# EAGLE board sh  j (EAGLE 7.2.0)
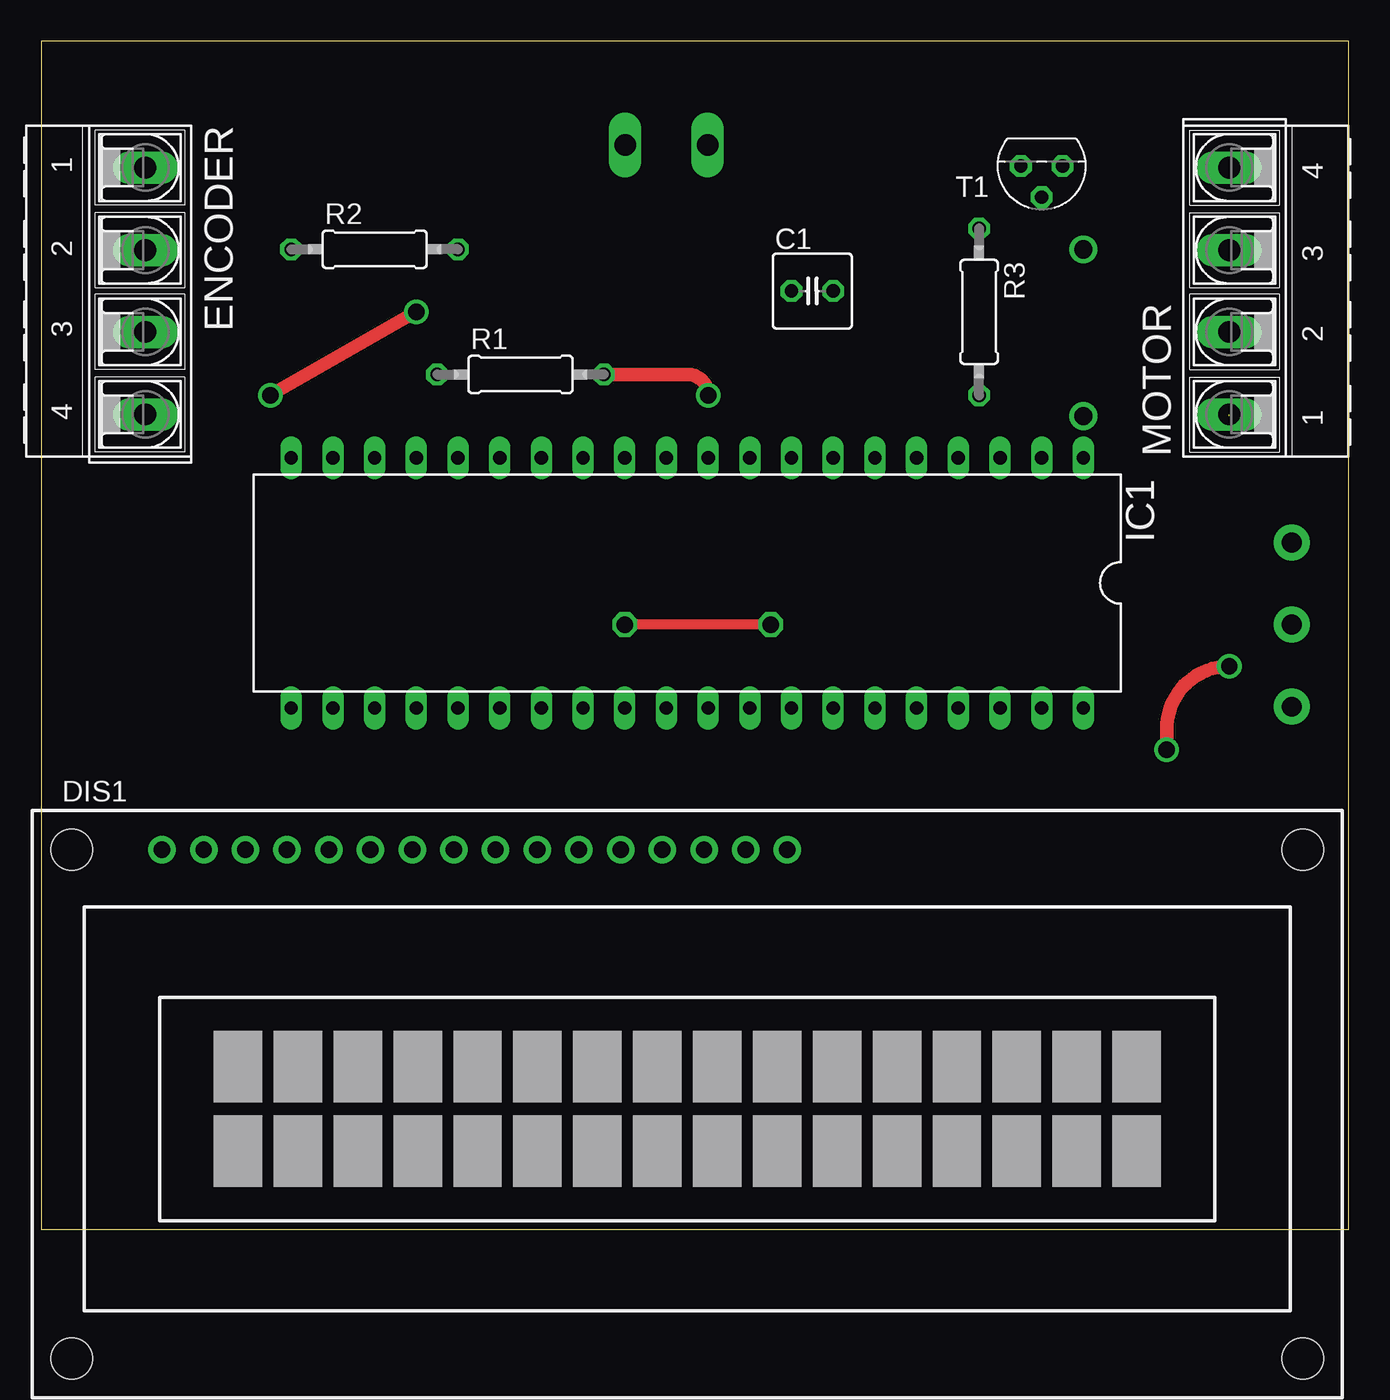
[diagram p0: board, top side]
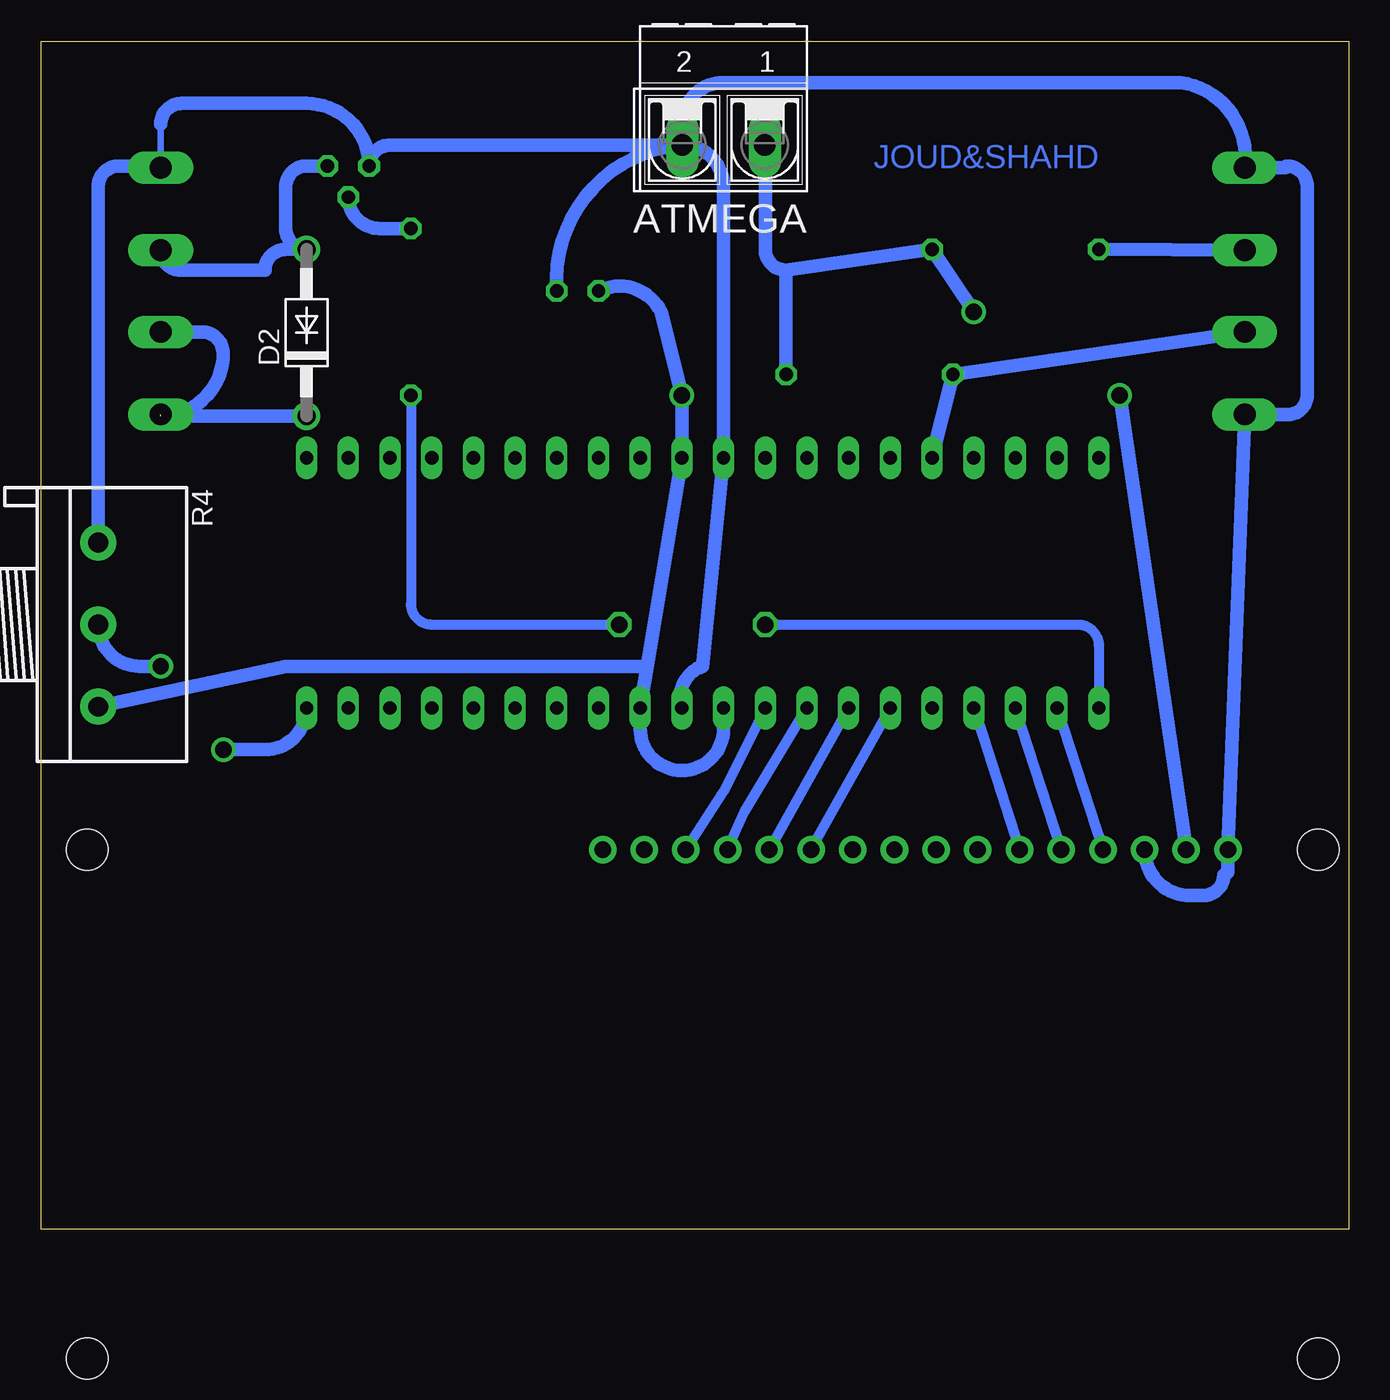
[diagram p1: board, bottom side, seen from below]

Size 79.68 x 72.38 mm. Coordinates in mm from the lower left corner, seen from the top.
Outline: 0,0 79.68,0 79.68,72.38 0,72.38 0,0
Copper layers (1*16): Top 0.035mm / dielectric 1.5mm / Bottom 0.035mm
Design rules "default": minimum track width 10mil, minimum drill 24mil, track to track 8mil, track to pad 8mil, pad to pad 8mil, via to via 8mil, smd to smd 8mil, copper to edge 40mil, drill to drill 8mil, minimum pad ring 10mil, minimum via ring 8mil, stop-mask expansion 4mil, vias tented up to drill 0mil, thermal gap 10mil

## Footprints (pad centres in the part's own frame; a part is rotated, then mirrored left to right if it is on the bottom)
AK500/2-H = drill 1.321 long: 1 -2.515,0; 2 2.515,0
C025-050X050 = drill 0.813 octagon: 1 -1.27,0; 2 1.27,0
DO41-10 = drill 1.118: A 5.08,0; C -5.08,0
TUXGR_16X2_R2 = drill 1 pad 1.676: 1 -32,15.5; 2 -29.46,15.5; 3 -26.92,15.5; 4 -24.38,15.5; 5 -21.84,15.5; 6 -19.3,15.5; 7 -16.76,15.5; 8 -14.22,15.5; 9 -11.68,15.5; 10 -9.14,15.5; 11 -6.6,15.5; 12 -4.06,15.5; 13 -1.52,15.5; 14 1.02,15.5; 15 3.56,15.5; 16 6.1,15.5 | hole 2.5: -37.5,-15.5; 37.5,-15.5; -37.5,15.5; 37.5,15.5
AK500/4-H = drill 1.321 long: 1 -7.518,0; 2 -2.489,0; 3 2.489,0; 4 7.518,0
DIL40 = drill 0.813 long: 1 -24.13,-7.62; 2 -21.59,-7.62; 3 -19.05,-7.62; 4 -16.51,-7.62; 5 -13.97,-7.62; 6 -11.43,-7.62; 7 -8.89,-7.62; 8 -6.35,-7.62; 9 -3.81,-7.62; 10 -1.27,-7.62; 11 1.27,-7.62; 12 3.81,-7.62; 13 6.35,-7.62; 14 8.89,-7.62; 15 11.43,-7.62; 16 13.97,-7.62; 17 16.51,-7.62; 18 19.05,-7.62; 19 21.59,-7.62; 20 24.13,-7.62; 21 24.13,7.62; 22 21.59,7.62; 23 19.05,7.62; 24 16.51,7.62; 25 13.97,7.62; 26 11.43,7.62; 27 8.89,7.62; 28 6.35,7.62; 29 3.81,7.62; 30 1.27,7.62; 31 -1.27,7.62; 32 -3.81,7.62; 33 -6.35,7.62; 34 -8.89,7.62; 35 -11.43,7.62; 36 -13.97,7.62; 37 -16.51,7.62; 38 -19.05,7.62; 39 -21.59,7.62; 40 -24.13,7.62
0207/10 = drill 0.813 octagon: 1 -5.08,0; 2 5.08,0
3RP/1610N = drill 1.2 pad 2.184: 1 -5,0; 2 0,0; 3 5,0
TO92 = drill 0.813 octagon: 1 1.27,0; 2 0,1.905; 3 -1.27,0

## Placement (x,y rotation side)
ATMEGA  [AK500/2-H]  38.1,66.04 180 bottom
C1  [C025-050X050]  46.99,57.15 0 top
D2  1N4004  [DO41-10]  63.5,54.61 90 bottom
DIS1  TUXGR_16X2_R2  [TUXGR_16X2_R2]  39.37,7.62 0 top
ENCODER  [AK500/4-H]  6.35,57.15 270 top
IC1  MEGA16-P  [DIL40]  39.37,39.37 180 top
MOTOR  [AK500/4-H]  72.39,57.15 90 top
R1  10k  [0207/10]  29.21,52.07 0 top
R2  330  [0207/10]  20.32,59.69 0 top
R3  220  [0207/10]  57.15,55.88 270 top
R4  [3RP/1610N]  76.2,36.83 270 bottom
T1  BC337  [TO92]  60.96,64.77 180 top

## Library data of the parts
ATMEGA ENCODER MOTOR = con-ptr500; OC_FARNELL: unknown; OC_NEWARK: unknown
C1 = rcl
D2 = diode
DIS1 = display-lcd; OC_FARNELL: unknown; OC_NEWARK: unknown
IC1 = atmel; MPN: ATMEGA16-16PU; OC_FARNELL: 9171142; OC_NEWARK: 01M6885
R1-R3 = resistor
R4 = pot
T1 = transistor

## Nets
N$1: DIS1.14 IC1.29
N$2: DIS1.13 IC1.28
N$3: DIS1.12 IC1.27
N$4: DIS1.11 IC1.26
N$5: DIS1.6 IC1.24
N$6: DIS1.5 IC1.23
N$7: DIS1.4 IC1.22
N$8: ATMEGA.2 C1.2 DIS1.1 DIS1.3 ENCODER.1 ENCODER.4 IC1.11 IC1.31 MOTOR.4 R4.1 T1.1
N$9: R3.1 T1.2
N$10: IC1.21 R3.2
N$11: ENCODER.3 IC1.16 R1.1
N$12: D2.C MOTOR.1 MOTOR.2
N$13: D2.A MOTOR.3 T1.3
N$14: IC1.40 R4.2
N$15: ENCODER.2 R2.1
N$18: ATMEGA.1 C1.1 DIS1.2 IC1.10 IC1.30 IC1.32 R1.2 R2.2 R4.3

## Tracks (layer width: path | path; a pad name or v marks a point on that pad's centre or on a via)
N$1
  Bottom 0.61: IC1.29 38.1,26.67 DIS1.14
N$2
  Bottom 0.61: DIS1.13 36.83,25.4 IC1.28
N$3
  Bottom 0.61: IC1.27 DIS1.12
N$4
  Bottom 0.61: DIS1.11 IC1.26
N$5
  Bottom 0.61: IC1.24 DIS1.6
N$6
  Bottom 0.61: DIS1.5 IC1.23
N$7
  Bottom 0.61: IC1.22 DIS1.4
N$8
  Bottom 0.406: 40.62,67.33 ATMEGA.2 | 72.39,67.31 MOTOR.4 arc-90 72.49,64.77
  Bottom 0.813: ATMEGA.2 58.42,66.04 arc-90 T1.1 arc-90 63.5,68.58 71.12,68.58 arc-90 72.39,67.31 | ATMEGA.2 arc90 38.1,63.52 IC1.11 39.37,34.29 arc-90 IC1.31 | 40.62,67.33 arc90 38.1,69.85 10.26,69.85 arc90 ENCODER.1 3.91,64.67 arc-90 3.81,64.77 arc90 2.54,63.5 2.54,50.8 arc90 3.71,49.63 ENCODER.4 DIS1.1 7.37,21.84 arc90 7.62,21.59 arc90 8.89,20.32 9.65,20.32 arc90 DIS1.3 | 72.49,64.77 74.93,64.77 arc-90 76.2,63.5 R4.1 | C1.2 arc90 40.64,66.04 ATMEGA.2
N$9
  Bottom 0.813: T1.2 arc-90 59.05,60.96 R3.1
N$10  (via drill 1)
  Top 0.61: v44.45,36.83 v35.56,36.83
  Bottom 0.61: R3.2 57.15,38.1 arc-90 55.88,36.83 v44.45,36.83 | v35.56,36.83 16.51,36.83 arc90 15.24,35.56 IC1.21
N$11
  Bottom 0.813: ENCODER.3 R1.1 IC1.16
N$12  (1 unrouted)
  Bottom 0.813: MOTOR.2 69.9,54.66 arc90 68.58,53.34 arc90 72.39,49.53 66.04,49.53 64.77,49.53 D2.C
N$13
  Bottom 0.813: MOTOR.3 arc-90 71.17,58.42 66.04,58.42 arc90 64.77,59.69 D2.A arc90 64.77,60.96 64.77,63.5 arc90 63.5,64.77 T1.3
N$14  (via drill 1 pad 0.41)
  Top 0.813: v72.39,34.29 arc90 68.58,30.48 v68.58,29.21
  Bottom 0.813: R4.2 arc-90 73.66,34.29 v72.39,34.29 | v68.58,29.21 66.04,29.21 arc-90 IC1.40
N$15
  Bottom 0.813: ENCODER.2 R2.1
N$18  (via drill 1)
  Top 0.813: v40.64,50.8 arc90 39.37,52.07 R1.2 | v13.97,50.8 v22.86,55.88
  Bottom 0.813: ATMEGA.1 arc90 35.56,66.02 35.56,59.69 arc-90 34.29,58.42 | 34.29,58.42 R2.2 v22.86,55.88 | R1.2 34.29,58.42 | C1.1 arc90 41.91,55.88 v40.64,50.8 IC1.10 42.77,34.22 | 42.77,34.22 IC1.32 43.18,30.48 arc-90 40.64,27.94 arc-90 38.1,30.48 IC1.30 | DIS1.2 v13.97,50.8 | R4.3 64.77,34.29 42.84,34.29 arc90 42.77,34.22

## Text on the board
Bottom: JOUD&SHAHD